# EAGLE board Laser-Battle-IR-Sensor (EAGLE 7.5.0)
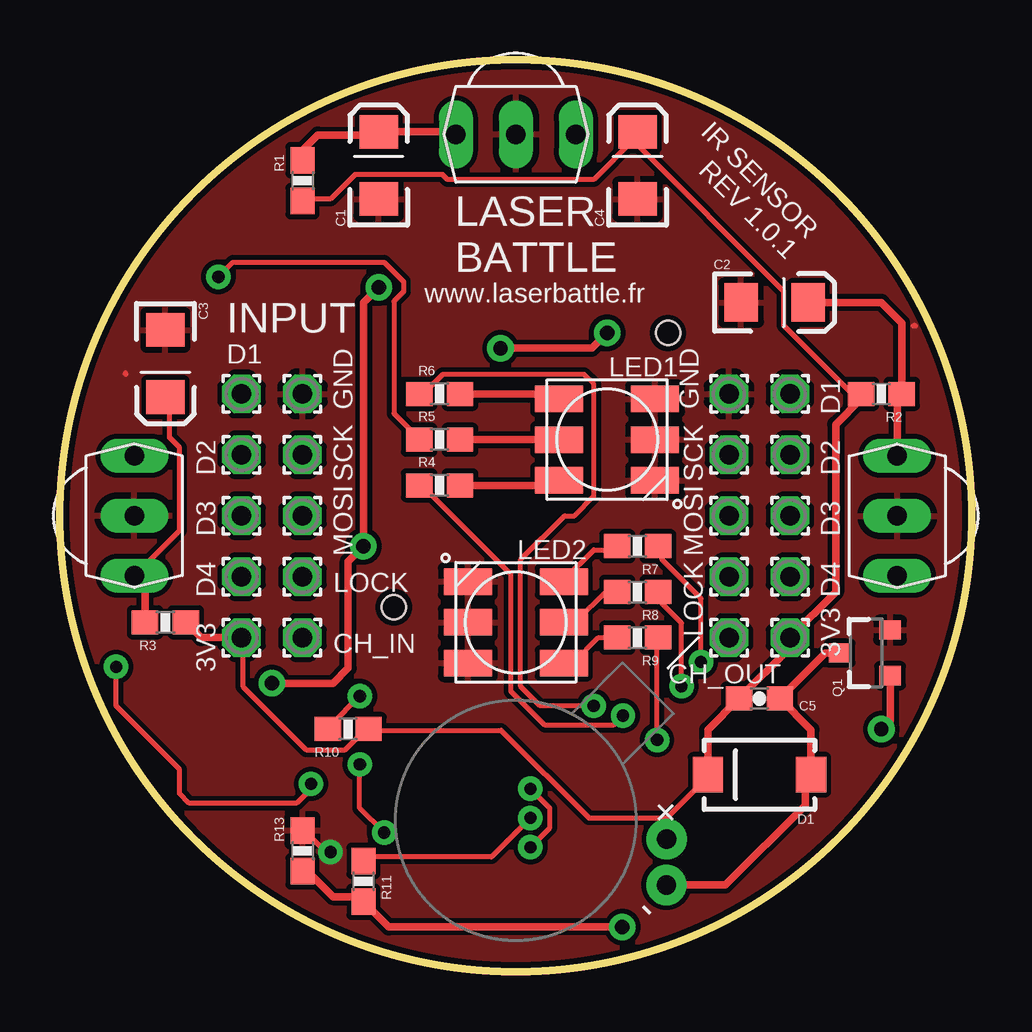
[diagram p0: board, top side]
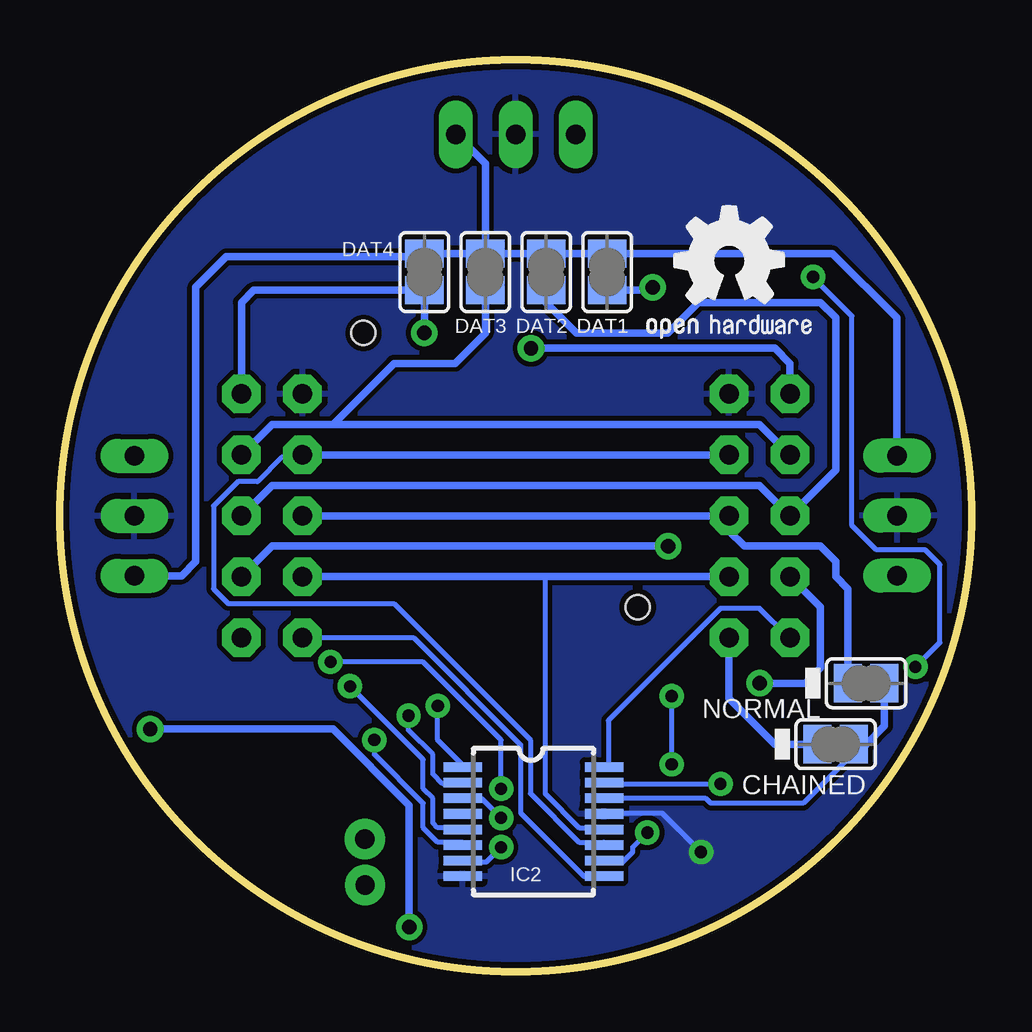
[diagram p1: board, bottom side, seen from below]

Size 38 x 38 mm. Coordinates in mm from the lower left corner, seen from the top.
Outline: circle at 19,19 radius 19
Copper layers (1*16): Top 0.035mm / dielectric 1.5mm / Bottom 0.035mm
Design rules "SparkFun": minimum track width 8mil, minimum drill 20mil, track to track 8mil, track to pad 8mil, pad to pad 8mil, via to via 8mil, smd to smd 8mil, copper to edge 10mil, drill to drill 8mil, minimum pad ring 12mil, minimum via ring 10mil, stop-mask expansion 4mil, vias tented up to drill 25mil, thermal gap 10mil
Holes 1 mm at 25.35,26.62 13.92,15.19

## Footprints (pad centres in the part's own frame; a part is rotated, then mirrored left to right if it is on the bottom)
EIA3216 = smd 1.4 x 1.6: A 1.4,0; C -1.4,0
0603-CAP = smd 1.1 x 1: 1 -0.85,0; 2 0.85,0
SMA-DIODE = smd 1.27 x 1.47: A -2.15,0; C 2.15,0
TSSOP16 = smd 0.4 x 1.6: 1 -2.225,-2.85; 2 -1.575,-2.85; 3 -0.925,-2.85; 4 -0.275,-2.85; 5 0.375,-2.85; 6 1.025,-2.85; 7 1.675,-2.85; 8 2.325,-2.85; 9 2.325,3.05; 10 1.675,3.05; 11 1.025,3.05; 12 0.375,3.05; 13 -0.275,3.05; 14 -0.925,3.05; 15 -1.575,3.05; 16 -2.225,3.05
TSOP18XX = drill 0.813 long: GND -0.001,-0.027; OUT -2.501,-0.027; VCC 2.499,-0.027
RGBLED5050 = smd 2 x 1.1: 1 -2,1.7; 2 -2,0; 3 -2,-1.7; 4 2,-1.7; 5 2,0; 6 2,1.7
VIBE-MOTOR-10MM = drill 0.8 pad 1.676: + -5,-3.9; - -6.35,-2.54
1,6/0,8 = drill 0.813 pad 1.6 octagon: 1 0,0
SOT23-3 = smd 0.8 x 0.9: 1 -0.95,-1; 2 0.95,-1; 3 0,1.1
0603-RES = smd 1.1 x 1: 1 -0.85,0; 2 0.85,0
SJ = smd 1.168 x 1.6: 1 -0.762,0; 2 0.762,0

## Placement (x,y rotation side)
C1  10u  [EIA3216]  13.29,33.61 90 top
C2  10u  [EIA3216]  29.8,27.89 0 top
C3  10u  [EIA3216]  4.39,25.35 270 top
C4  0.1u  [EIA3216]  24.08,33.61 90 top
C5  10u  [0603-CAP]  29.16,11.38 0 top
D1  S1 A/AB  [SMA-DIODE]  29.16,8.21 180 top
GOLD_ORB_SM1  OSHWLOGO_GOLD_ORB_SM  [OSHW2]  13.92,25.35 0 bottom
IC2  SN74HC595  [TSSOP16]  18.36,6.3 270 bottom
IR1  TSOP4856  [TSOP18XX]  19,34.88 180 top
IR2  TSOP4856  [TSOP18XX]  34.88,19 90 top
IR3  TSOP4856  [TSOP18XX]  3.12,19 270 top
LED1  RGBLED5050  [RGBLED5050]  22.81,22.18 0 top
LED2  RGBLED5050  [RGBLED5050]  19,14.55 180 top
M1  MOTOR10MM  [VIBE-MOTOR-10MM]  19,6.3 135 top
PAD1  [1,6/0,8]  7.57,24.08 0 top
PAD2  [1,6/0,8]  7.57,21.54 0 top
PAD3  [1,6/0,8]  7.57,19 0 top
PAD4  [1,6/0,8]  7.57,16.46 0 top
PAD5  [1,6/0,8]  7.57,13.92 0 top
PAD6  [1,6/0,8]  10.11,24.08 0 top
PAD7  [1,6/0,8]  10.11,21.54 0 top
PAD8  [1,6/0,8]  10.11,19 0 top
PAD9  [1,6/0,8]  10.11,16.46 0 top
PAD10  [1,6/0,8]  10.11,13.92 0 top
PAD11  [1,6/0,8]  30.43,24.08 0 top
PAD12  [1,6/0,8]  30.43,21.54 0 top
PAD13  [1,6/0,8]  30.43,19 0 top
PAD14  [1,6/0,8]  30.43,16.46 0 top
PAD15  [1,6/0,8]  30.43,13.92 0 top
PAD16  [1,6/0,8]  27.89,24.08 0 top
PAD17  [1,6/0,8]  27.89,21.54 0 top
PAD18  [1,6/0,8]  27.89,19 0 top
PAD19  [1,6/0,8]  27.89,16.46 0 top
PAD20  [1,6/0,8]  27.89,13.92 0 top
Q1  200mA/50V BSS138  [SOT23-3]  33.61,13.29 90 top
R1  100  [0603-RES]  10.11,32.97 270 top
R2  100  [0603-RES]  34.24,24.08 180 top
R3  100  [0603-RES]  4.39,14.55 0 top
R4  330  [0603-RES]  15.82,20.27 0 top
R5  330  [0603-RES]  15.82,22.18 0 top
R6  330  [0603-RES]  15.82,24.08 0 top
R7  330  [0603-RES]  24.08,17.73 180 top
R8  330  [0603-RES]  24.08,15.82 180 top
R9  330  [0603-RES]  24.08,13.92 180 top
R10  10K  [0603-RES]  12.02,10.11 0 top
R11  330  [0603-RES]  12.65,3.76 270 top
R13  10K  [0603-RES]  10.11,5.03 270 top
SJ1  [SJ]  22.81,29.16 90 bottom
SJ2  [SJ]  20.27,29.16 90 bottom
SJ3  [SJ]  17.73,29.16 90 bottom
SJ4  [SJ]  15.19,29.16 90 bottom
SJ5  [SJ]  4.39,12.02 0 bottom
SJ6  [SJ]  5.66,9.47 0 bottom

## Library data of the parts
C1-C5 = SparkFun-Passives
D1 = SparkFun-DiscreteSemi
GOLD_ORB_SM1 = NBitWonder
IC2 = SparkFun-DigitalIC
IR1-IR3 = tsop
LED1 LED2 = adafruit
M1 = SparkFun-Electromechanical
PAD1-PAD20 = wirepad
Q1 = SparkFun-DiscreteSemi; PROD_ID: TRANS-00830
R1-R3 = SparkFun-Resistors; PROD_ID: RES-07863
R4-R9 = SparkFun-Resistors; PROD_ID: RES-07851
R10 R13 = SparkFun-Resistors; PROD_ID: RES-00824
R11 = SparkFun-Resistors; PROD_ID: RES-00818
SJ1-SJ6 = jumper

## Nets
+3V3: C4.A C5.1 D1.C IC2.16 M1.+ PAD5.1 PAD15.1 R1.2 R2.2 R3.2 R10.2
DATA: IR1.OUT IR2.OUT IR3.OUT SJ1.2 SJ2.2 SJ3.2 SJ4.2
DATA1: PAD1.1 PAD11.1 SJ1.1
DATA2: PAD2.1 PAD12.1 SJ2.1
DATA3: PAD3.1 PAD13.1 SJ3.1
DATA4: PAD4.1 PAD14.1 SJ4.1
DATA_CHAIN_IN: PAD10.1 SJ6.1
DATA_CHAIN_OUT: IC2.9 PAD20.1
GND: C1.C C2.C C3.C C4.C IC2.8 IC2.13 IR1.GND IR2.GND IR3.GND LED1.4 LED1.5 LED1.6 LED2.4 LED2.5 LED2.6 PAD6.1 PAD16.1 Q1.2 R13.1
N$1: C3.A IR3.VCC R3.1
N$2: C2.A IR2.VCC R2.1
N$3: IC2.10 R10.1
N$4: C1.A IR1.VCC R1.1
N$6: LED1.3 R4.2
N$7: LED1.1 R6.2
N$8: LED1.2 R5.2
N$9: LED2.3 R7.2
N$10: LED2.1 R9.2
N$11: LED2.2 R8.2
N$12: IC2.15 R5.1
N$13: IC2.1 R6.1
N$14: IC2.2 R4.1
N$15: IC2.5 R8.1
N$16: IC2.6 R9.1
N$17: IC2.7 R7.1
N$18: C5.2 D1.A M1.- Q1.3
N$19: Q1.1 R11.2 R13.2
SDI: IC2.14 SJ5.2 SJ6.2
SPI_LOCK: IC2.12 PAD9.1 PAD19.1
SPI_MOSI: PAD8.1 PAD18.1 SJ5.1
SPI_SCK: IC2.11 PAD7.1 PAD17.1
VIB1: IC2.3 R11.1

## Tracks (layer width: path | path; a pad name or v marks a point on that pad's centre or on a via)
+3V3
  Top 0.203: 23.88,34.65 24.08,34.85 C4.A 23.88,34.65 | 23.88,34.65 22.25,33.02 16.16,33.02 15.95,33.22 12.29,33.22 11.28,32.21 10.26,32.21 R1.2 | 23.88,34.65 30.18,28.35 30.18,26.93 33.22,23.88 R2.2 | 25.3,6.4 25.3,5.59 M1.+ | 25.3,6.4 26.93,8.03 D1.C | PAD5.1 7.62,13.92 7.62,11.89 10.26,9.25 11.89,9.25 12.7,10.06 R10.2 12.9,10.06 18.39,10.06 22.05,6.4 25.3,6.4
  Top 0.305: PAD5.1 5.88,13.92 R3.2 | D1.C 27.01,10.08 C5.1 30.43,13.5 PAD15.1 32.34,15.82 32.34,22.81 33.39,23.87 R2.2
  Bottom 0.203: IC2.16 15.14,8.64 15.14,10.47 10.47,15.14 8.84,15.14 7.62,13.92 PAD5.1
DATA
  Bottom 0.305: SJ2.2 SJ1.2 22.94,29.8 31.06,29.8 32.34,28.52 32.34,17.09 32.93,16.5 IR2.OUT | SJ2.2 SJ3.2 SJ4.2 5.79,29.92 3.12,27.26 3.12,21.53 IR3.OUT | SJ2.2 20.27,33.67 IR1.OUT
DATA1  (via drill 0.6)
  Top 0.305: v18.36,25.98 22.18,25.98 v22.81,26.62
  Bottom 0.305: PAD11.1 30.43,27.89 29.92,28.4 SJ1.1 v22.81,26.62 | PAD1.1 7.57,25.35 8.21,25.98 v18.36,25.98
DATA2
  Bottom 0.305: PAD12.1 29.16,22.81 26.62,22.81 | PAD2.1 8.84,22.81 26.62,22.81 | SJ2.1 20.27,26.62 21.54,25.35 24.08,25.35 26.62,22.81
DATA3
  Bottom 0.305: PAD13.1 29.16,20.27 8.84,20.27 PAD3.1 5.66,20.91 5.66,27.26 6.3,27.89 11.38,27.89 12.65,26.62 16.46,26.62 17.73,27.89 SJ3.1
DATA4  (via drill 0.6)
  Top 0.305: v8.84,12.02 11.38,12.02 12.02,12.65 12.02,17.09 v12.65,17.73 12.65,27.89 v13.29,28.52
  Bottom 0.305: PAD14.1 29.16,17.73 v12.65,17.73 | PAD4.1 6.3,15.19 6.3,12.65 6.94,12.02 v8.84,12.02 | SJ4.1 13.29,28.4 v13.29,28.52
DATA_CHAIN_IN
  Bottom 0.305: SJ6.1 8.21,9.47 10.11,11.38 PAD10.1
DATA_CHAIN_OUT
  Bottom 0.203: PAD20.1 23.27,13.92 18.8,9.45 18.8,6.61 16.16,3.96 15.34,3.96 IC2.9
GND  (via drill 0.51)
  Top 0.203: 2.74,24.89 2.73,24.95 | v11.28,4.98 11.07,4.98 10.26,5.79 R13.1 | 35.66,26.93 35.57,26.93
  Bottom 0.203: v11.28,4.98 12.9,6.61 15.14,6.61
  Bottom 0.305: IR2.GND 35.51,19
  pour Top: -1.32,39.32 39.32,39.32 39.32,-1.32 -1.32,-1.32
  pour Bottom: -1.32,39.32 39.32,39.32 39.32,-1.32 -1.32,-1.32
N$1
  Top 0.203: C3.A 4.57,23.88 4.57,22.25 4.98,21.84 4.98,18.39 3.15,16.56 IR3.VCC
  Top 0.305: R3.1 3.54,16.05 IR3.VCC
N$2
  Top 0.305: IR2.VCC 34.9,23.89 R2.1 35.09,27.04 34.24,27.89 C2.A
N$3  (via drill 0.51)
  Top 0.203: v12.5,11.48 11.28,10.26 R10.1 | v12.5,8.64 12.5,6.81 v13.51,5.79
  Bottom 0.203: v12.5,8.64 v12.5,11.48 | v13.51,5.79 14.12,5.18 14.12,4.98 14.53,4.57 15.14,4.57 IC2.10
N$4
  Top 0.305: IR1.VCC 16.4,35 C1.A 13.16,34.88 10.74,34.88 10.11,34.24 R1.1
N$6
  Top 0.305: R4.2 20.61,20.27 LED1.3
N$7
  Top 0.305: R6.2 20.61,24.08 LED1.1
N$8
  Top 0.305: R5.2 LED1.2
N$9
  Top 0.203: R7.2 23.06,17.58 22.25,17.58 21.03,16.36 LED2.3
N$10
  Top 0.203: R9.2 22.45,13.92 21.44,12.9 21.03,12.9 LED2.1
N$11
  Top 0.203: R8.2 23.06,15.75 22.66,15.75 21.64,14.73 21.03,14.73 LED2.2
N$12  (via drill 0.51)
  Top 0.203: v6.61,28.96 7.21,29.57 13.51,29.57 14.33,28.75 14.33,28.35 13.92,27.94 13.92,23.27 14.94,22.25 R5.1 | v2.34,12.7 2.34,11.07 4.98,8.43 4.98,7.42 5.39,7.01 9.86,7.01 10.47,7.62 v10.47,7.82
  Bottom 0.203: v6.61,28.96 4.98,27.33 4.98,18.59 3.96,17.58 1.93,17.58 1.32,16.97 1.32,13.72 v2.34,12.7 | v10.47,7.82 15.14,7.82 IC2.15
N$13  (via drill 0.51)
  Top 0.203: v22.25,11.07 20.02,11.07 19.2,11.89 19.2,17.17 21.03,19 21.44,19 22.25,19.81 22.25,24.49 21.84,24.89 15.95,24.89 15.14,24.08 R6.1
  Bottom 0.203: v22.25,11.07 22.25,9.65 21.23,8.64 IC2.1
N$14  (via drill 0.51)
  Top 0.203: v23.47,10.67 23.06,10.26 20.22,10.26 18.8,11.68 18.8,16.56 15.14,20.22 R4.1
  Bottom 0.203: v23.47,10.67 23.47,10.06 22.45,9.04 22.45,8.23 22.05,7.82 21.23,7.82 IC2.2
N$15  (via drill 0.51)
  Top 0.203: v25.91,11.89 25.91,14.53 25.1,15.34 25.1,15.75 R8.1
  Bottom 0.203: v25.91,11.89 22.86,8.84 22.86,7.62 22.45,7.21 22.45,6.2 22.25,5.99 21.23,5.99 IC2.5
N$16  (via drill 0.51)
  Top 0.203: v24.89,9.65 24.89,13.92 R9.1
  Bottom 0.203: v24.89,9.65 24.89,9.04 22.86,7.01 22.86,5.99 22.25,5.39 21.23,5.39 IC2.6
N$17  (via drill 0.51)
  Top 0.203: v26.72,12.9 26.72,15.55 25.1,17.17 25.1,17.58 R7.1 | v19.61,7.62 20.42,6.81 20.42,5.99 v19.61,5.18
  Bottom 0.203: v26.72,12.9 22.86,12.9 19.61,9.65 v19.61,7.62 | v19.61,5.18 20.22,4.57 21.03,4.57 IC2.7
N$18
  Top 0.305: Q1.3 31.91,13.29 C5.2 31.31,10.08 D1.A 31.06,7.96 31.06,6.94 27.74,3.61 M1.-
N$19  (via drill 0.6)
  Top 0.305: R13.2 10.32,4.18 11.38,3.12 12.43,3.12 R11.2 13.71,1.86 v23.45,1.86 | Q1.1 34.61,10.47 v34.24,10.11
  Bottom 0.305: v34.24,10.11 26.62,10.11 23.45,6.94 v23.45,1.86
SDI
  Bottom 0.203: IC2.14 15.14,7.21 11.07,7.21 10.87,7.01 7.01,7.01 4.57,9.45 SJ6.2
  Bottom 0.305: SJ5.2 3.63,10.24 4.39,9.47 SJ6.2
SPI_LOCK
  Bottom 0.203: 17.78,16.46 17.78,7.42 16.36,5.99 15.34,5.99 IC2.12
  Bottom 0.305: PAD19.1 17.78,16.46 PAD9.1
SPI_MOSI
  Bottom 0.305: SJ5.1 5.16,15.95 5.66,16.46 5.66,17.09 6.3,17.73 9.47,17.73 10.11,18.36 PAD8.1 PAD18.1
SPI_SCK
  Bottom 0.203: IC2.11 15.34,5.39 16.36,5.39 18.39,7.42 18.39,9.65 24.08,15.34 30.99,15.34 31.6,15.95 31.6,19.41 30.58,20.42 29.77,20.42 28.75,21.44 27.94,21.44 PAD17.1
  Bottom 0.305: PAD7.1 PAD17.1
VIB1  (via drill 0.51)
  Top 0.203: v19.61,6.4 17.98,4.78 12.7,4.78 R11.1
  Bottom 0.203: v19.61,6.4 20.42,7.21 21.03,7.21 IC2.3

## Text on the board
tNames: IR SENSOR / REV 1.0.1 | LASER / BATTLE | www.laserbattle.fr | INPUT | GND | D1 | D1 | SCK | SCK | GND | D2 | D2 | D3 | MOSI | MOSI | D3 | D4 | LOCK | D4 | LOCK | 3V3 | 3V3 | CH_IN | CH_OUT
bNames: DAT4 | DAT1 | DAT1 | DAT2 | DAT3 | NORMAL | CHAINED